# EAGLE board wirematrix (EAGLE 5.11)

Size 160 x 61.9 mm. Coordinates in mm from the lower left corner, seen from the top.
Outline: 0,0 160,0 160,61.9 0,61.9 0,0
Copper layers (1*16): Top 0.035mm / dielectric 1.5mm / Bottom 0.035mm
Design rules "default": minimum track width 10mil, minimum drill 24mil, track to track 8mil, track to pad 8mil, pad to pad 8mil, via to via 8mil, smd to smd 8mil, copper to edge 40mil, drill to drill 8mil, minimum pad ring 10mil, minimum via ring 8mil, stop-mask expansion 4mil, vias tented up to drill 0mil, thermal gap 10mil

## Footprints (pad centres in the part's own frame; a part is rotated, then mirrored left to right if it is on the bottom)
1X04 = drill 1.016 long: 1 -3.81,0; 2 -1.27,0; 3 1.27,0; 4 3.81,0
1X03 = drill 1.016 long: 1 -2.54,0; 2 0,0; 3 2.54,0
1X06 = drill 1.016 long: 1 -6.35,0; 2 -3.81,0; 3 -1.27,0; 4 1.27,0; 5 3.81,0; 6 6.35,0
1X11 = drill 1.016 long: 1 -12.7,0; 2 -10.16,0; 3 -7.62,0; 4 -5.08,0; 5 -2.54,0; 6 0,0; 7 2.54,0; 8 5.08,0; 9 7.62,0; 10 10.16,0; 11 12.7,0
1X08 = drill 1.016 long: 1 -8.89,0; 2 -6.35,0; 3 -3.81,0; 4 -1.27,0; 5 1.27,0; 6 3.81,0; 7 6.35,0; 8 8.89,0
1X05 = drill 1.016 long: 1 -5.08,0; 2 -2.54,0; 3 0,0; 4 2.54,0; 5 5.08,0
1X07 = drill 1.016 long: 1 -7.62,0; 2 -5.08,0; 3 -2.54,0; 4 0,0; 5 2.54,0; 6 5.08,0; 7 7.62,0

## Placement (x,y rotation side)
E2  [1X04]  109.22,8.89 180 top
E3  [1X04]  55.88,8.89 180 top
E4  [1X03]  77.47,8.89 180 top
FL2  [1X06]  114.3,26.67 180 top
FL3  [1X11]  67.31,26.67 180 top
JD4  [1X08]  129.54,34.29 0 top
JD5  [1X08]  104.14,34.29 0 top
JD6  [1X08]  78.74,34.29 0 top
JD7  [1X08]  53.34,34.29 0 top
JD8  [1X08]  27.94,34.29 0 top
O2  [1X05]  102.87,17.78 180 top
O3  [1X07]  62.23,17.78 0 top
O4  [1X06]  78.74,17.78 0 top

## Library data of the parts
E2-E4 FL2 FL3 JD4-JD8 O2-O4 = pinhead

## Nets
N$1: E2.3 FL2.3 JD8.1 O2.1 O3.4
N$2: E2.1 FL2.1 FL3.5 JD8.6
N$3: E2.2 FL2.5 JD5.7
N$4: E2.4 JD5.5
N$5: E3.4 JD8.2 O4.5
N$6: E3.3 FL3.11 JD7.5 O3.1
N$7: E3.2 FL3.10 JD7.6 O3.2
N$8: E3.1 FL3.9 JD7.7 O3.3
N$9: E4.3 FL3.7 JD8.4 O3.7
N$10: E4.2 FL3.2 JD7.3 O4.3
N$11: E4.1 FL3.1 JD7.4 O4.4
N$12: JD5.2 O2.5
N$13: JD5.3 O2.4
N$14: JD5.4 O2.3
N$15: FL2.4 JD5.8 O2.2
N$16: FL2.6 JD5.6
N$17: JD8.3 O4.6
N$20: FL3.3 JD7.2 O3.6 O4.2
N$21: FL3.4 JD7.1 O3.5 O4.1
N$22: FL2.2 FL3.6 JD8.5
N$24: FL3.8 JD7.8

## Tracks (layer width: path | path; a pad name or v marks a point on that pad's centre or on a via)
N$1  (4 unrouted)
N$2  (3 unrouted)
N$3  (2 unrouted)
N$4  (1 unrouted)
N$5  (2 unrouted)
N$6  (3 unrouted)
N$7  (3 unrouted)
N$8  (3 unrouted)
N$9  (3 unrouted)
N$10  (3 unrouted)
N$11  (3 unrouted)
N$12  (1 unrouted)
N$13  (1 unrouted)
N$14  (1 unrouted)
N$15  (2 unrouted)
N$16  (1 unrouted)
N$17  (1 unrouted)
N$20  (3 unrouted)
N$21  (3 unrouted)
N$22  (2 unrouted)
N$24  (1 unrouted)